# Altium PCB STC最小系统板.PCBDOC
Units mm, origin at the board's own origin, x right, y up, seen from the top; angles counter-clockwise.
Board outline 50 x 70 mm, 2 copper layers (Top Layer, Bottom Layer); 17 components, 39 nets, 137 pads, 0 vias.
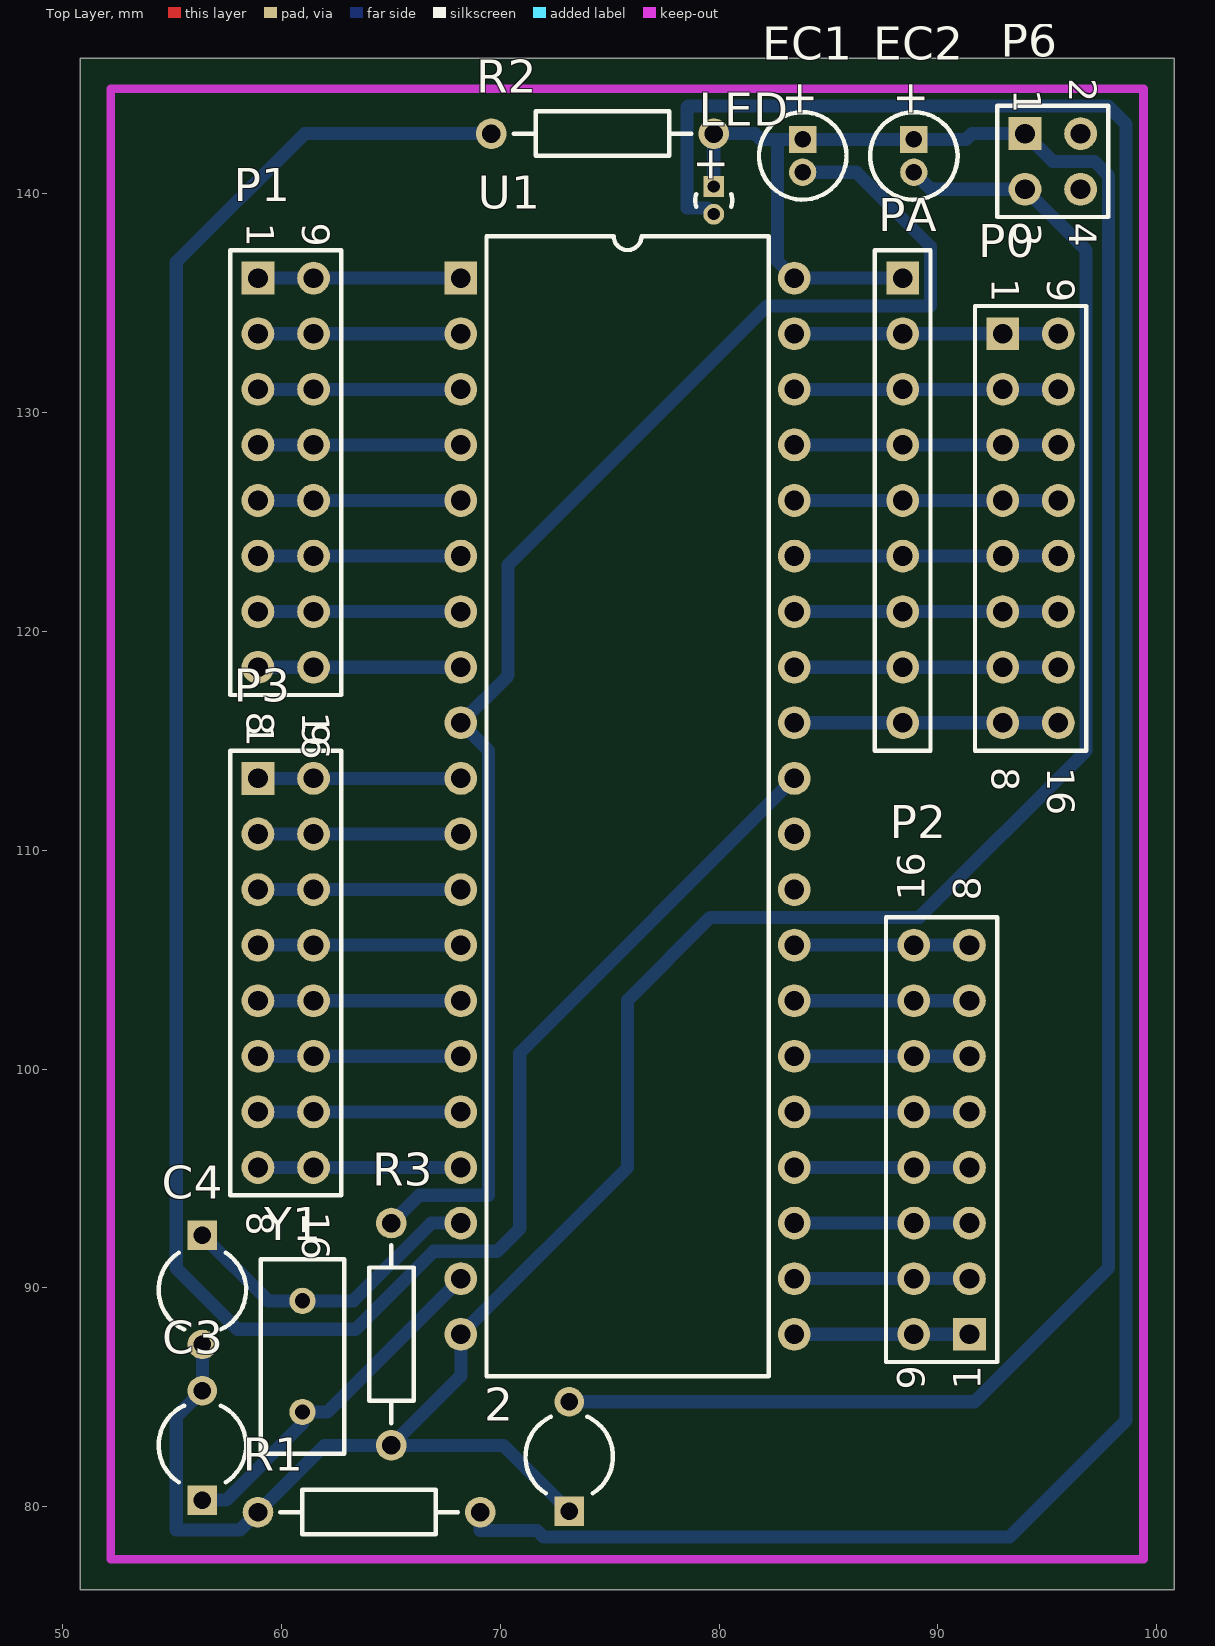
[diagram p0: Top Layer view]
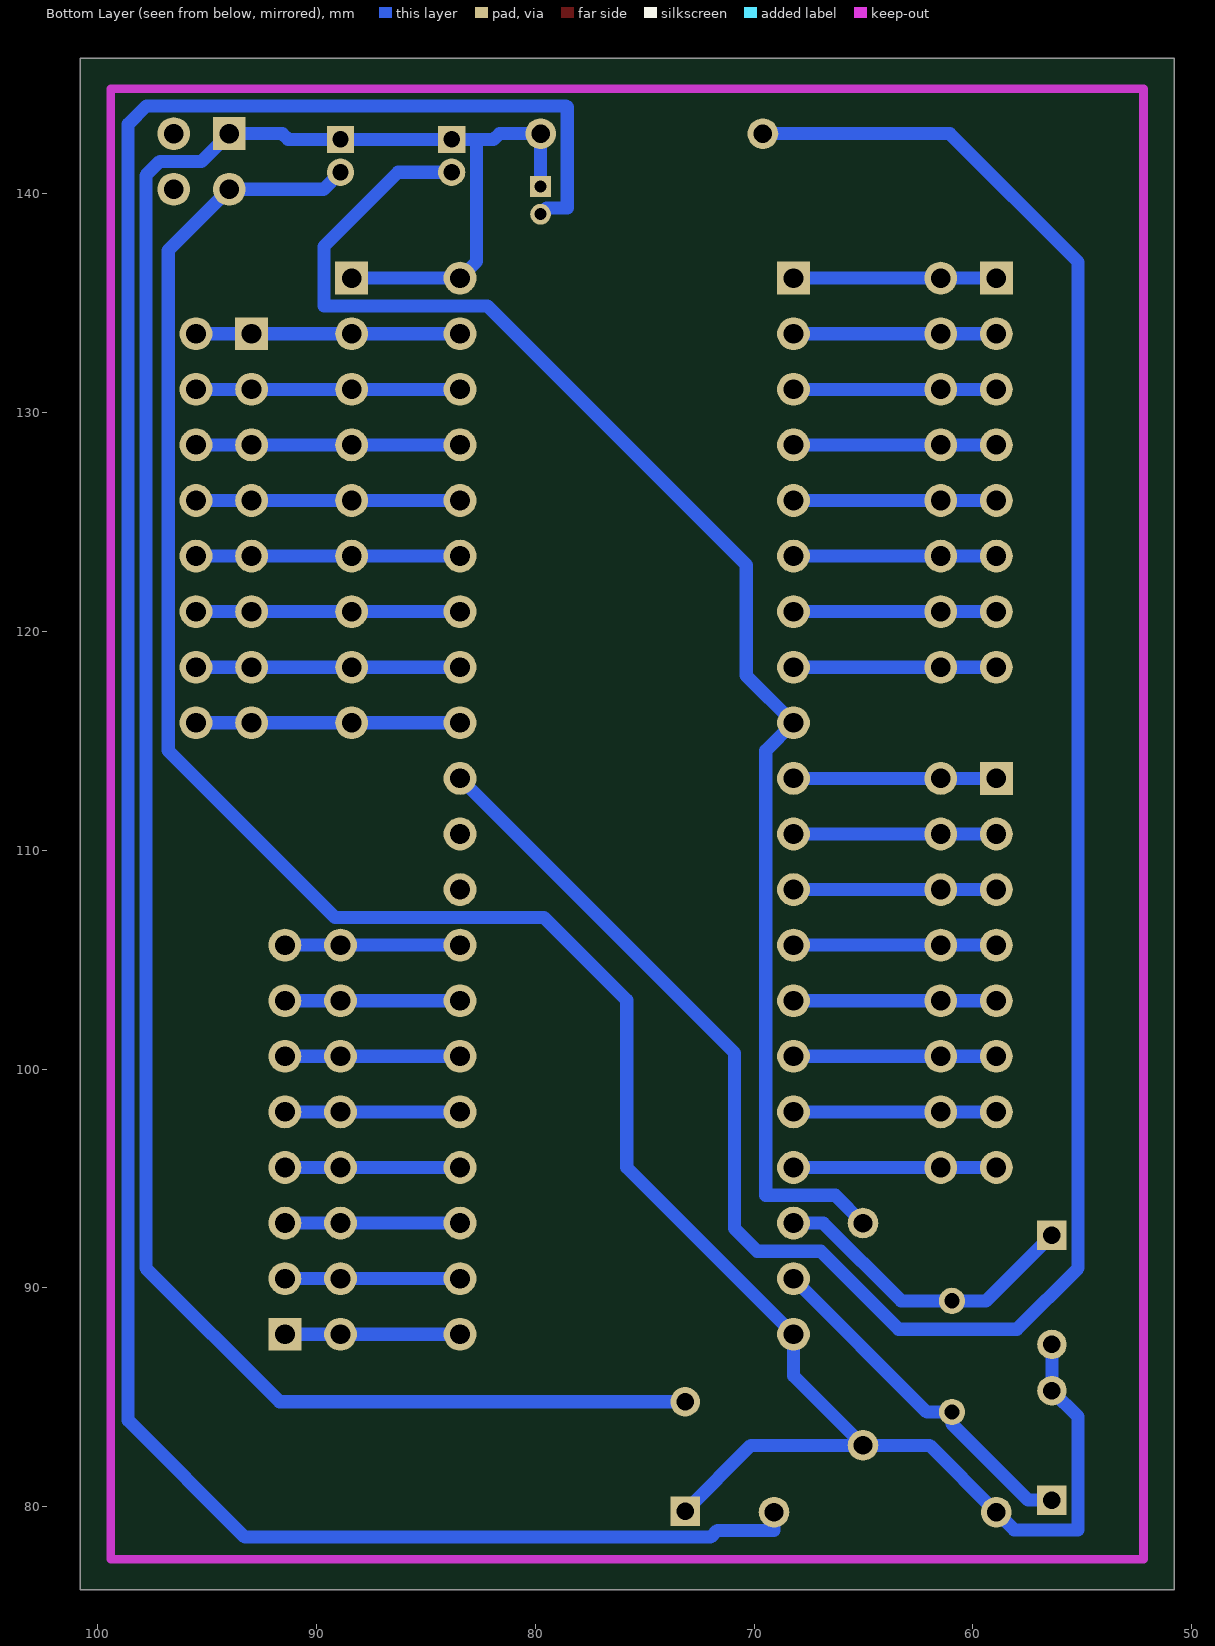
[diagram p1: Bottom Layer view, seen from below]

## Layer stack, top to bottom
Top Layer: signal copper 0.0356
Dielectric: dielectric 0.32, FR-4, Dk 4.8
Bottom Layer: signal copper 0.0356

## Board outline
50.8,76.2 100.8,76.2 100.8,146.2 50.8,146.2

## Design rules (kind name [scope] priority, off if disabled: settings)
Clearance [All] p1: gap=0.2
ComponentClearance [All] p1: gap=0.254 collisioncheckmode=0
PolygonConnect [All] p1: connectstyle=Relief reliefconductorwidth=0.254 reliefentries=4 polygonreliefangle="90 Angle"
RoutingLayers [All] p1: top layer_v5=FALSE bottom layer_v5=TRUE
RoutingVias [All] p1: holewidth=0.8 width=1.5 viastyle="Through Hole" minholewidth=0.711 minwidth=1.4 maxholewidth=0.711 maxwidth=1.6
SolderMaskExpansion [All] p1: expansion=0.102
TestPointUsage [All] p1: valid=0 allowmultiple=FALSE
Testpoint [All] p1: side=15 testpointundercomponent=TRUE minsize=1.016 maxsize=2.54 preferedsize=1.524 minholesize=0 maxholesize=1.016 preferedholesize=0.813 testpointgrid=0.025 style=1023 order=1234567890
Width Width_1 [All] p1: maxlimit=0.7 minlimit=0.6 preferedwidth=0.6
16 further rules are at their usual default settings.

## Components (designator, comment, footprint, x,y, rotation, side; value= is the part's Value field where it differs from the comment)
2 "Cap Semi" CAPR5-4X5 73.152,82.296 r90 top
C3 "Cap Semi" CAPR5-4X5 56.388,82.804 r90 top
C4 "Cap Semi" CAPR5-4X5 56.388,89.916 r270 top
EC1 "Cap Pol1" CAPPR1.5-4x5 83.82,141.732 r270 top
EC2 "Cap Pol1" CAPPR1.5-4x5 88.9,141.732 r270 top
LED "LED0" CAPPR1.27-1.7x2.8 79.756,139.7 r270 top
P0 "Header 8X2A" HDR2X8_CEN 92.964,133.604 r270 top
P1 "Header 8X2A" HDR2X8_CEN 58.928,136.144 r270 top
P2 "Header 8X2A" HDR2X8_CEN 91.44,87.884 r90 top
P3 "Header 8X2A" HDR2X8_CEN 58.928,113.284 r270 top
P6 "MHDR2X2" HDR2X2 93.98,142.748 r270 top
PA "Header 9" HDR1X9 88.392,136.144 r270 top
R1 "Res2" AXIAL-0.4 64.008,79.756 r180 top
R2 "Res2" AXIAL-0.4 74.676,142.748 r0 top
R3 "Res2" AXIAL-0.4 65.024,87.884 r270 top
U1 "AT89C51RC" DIP-40 75.819,112.014 r270 top
Y1 "XTAL" RAD-0.2 60.96,86.868 r90 top

## Footprints (in the part's own frame and the unit in brackets; to place one, negate y for a bottom-side part, rotate by r counter-clockwise, add the part's x,y. Pads: shape width x height; smd on the part's side, far side on the other; paste and mask are expansions set on the pad)
AXIAL-0.4 [mm] "Resistor; 2 Leads"
  round 1.4 hole 0.85: 1(-5.08,0) 2(5.08,0)
  silkscreen extent -4.06,-1.02 4.06,1.02
CAPPR1.5-4x5 [mm] "Capacitor, Electrolytic, Radial; Body 4 x 5 mm (Dia.xH typ); Pin Spacing 1.5 mm (typ)"
  rect 1.25x1.25 hole 0.75: 1(-0.75,0)
  round 1.25 hole 0.75: 2(0.75,0)
  silkscreen extent -2,-2 2,2
CAPPR1.27-1.7x2.8 [mm] "Capacitor, Radial, Tantalum; Body 1.7 x 2.8 mm (Dia.xH max); Pin Spacing 1.27 mm (typ)"
  rect 0.95x0.95 hole 0.55: 1(-0.635,0)
  round 0.95 hole 0.55: 2(0.635,0)
  silkscreen extent -0.29,-0.85 0.29,0.85
CAPR5-4X5 [mm] "Capacitor; 2 Leads"
  rect 1.35x1.35 hole 0.8: 1(-2.5,0)
  round 1.35 hole 0.8: 2(2.5,0)
  silkscreen extent -1.69,-2 1.82,2
DIP-40 [mm]
  rect 1.5x1.5 hole 0.9: 1(-24.13,-7.62)
  round 1.5 hole 0.9: 2(-21.59,-7.62) 3(-19.05,-7.62) 4(-16.51,-7.62) 5(-13.97,-7.62) 6(-11.43,-7.62) 7(-8.89,-7.62) 8(-6.35,-7.62) 9(-3.81,-7.62) 10(-1.27,-7.62) 11(1.27,-7.62) 12(3.81,-7.62) 13(6.35,-7.62) 14(8.89,-7.62) 15(11.43,-7.62) 16(13.97,-7.62) 17(16.51,-7.62) 18(19.05,-7.62) 19(21.59,-7.62) 20(24.13,-7.62) 21(24.13,7.62) 22(21.59,7.62) 23(19.05,7.62) 24(16.51,7.62) 25(13.97,7.62) 26(11.43,7.62) 27(8.89,7.62) 28(6.35,7.62) 29(3.81,7.62) 30(1.27,7.62) 31(-1.27,7.62) 32(-3.81,7.62) 33(-6.35,7.62) 34(-8.89,7.62) 35(-11.43,7.62) 36(-13.97,7.62) 37(-16.51,7.62) 38(-19.05,7.62) 39(-21.59,7.62) 40(-24.13,7.62)
  silkscreen extent -26.05,-6.45 26.05,6.45
HDR1X9 [mm] "Connector; Header; 9 Position"
  rect 1.5x1.5 hole 0.9: 1(0,0)
  round 1.5 hole 0.9: 2(2.54,0) 3(5.08,0) 4(7.62,0) 5(10.16,0) 6(12.7,0) 7(15.24,0) 8(17.78,0) 9(20.32,0)
  silkscreen extent -1.27,-1.27 21.59,1.27
HDR2X2 [mm] "Connector; Header; 2x2 Position"
  rect 1.5x1.5 hole 0.9: 1(0,0)
  round 1.5 hole 0.9: 2(0,2.54) 3(2.54,0) 4(2.54,2.54)
  silkscreen extent -1.27,-1.27 3.81,3.81
HDR2X8_CEN [mm] "Connector; Header; 8x2 Position"
  rect 1.5x1.5 hole 0.9: 1(0,0)
  round 1.5 hole 0.9: 2(2.54,0) 3(5.08,0) 4(7.62,0) 5(10.16,0) 6(12.7,0) 7(15.24,0) 8(17.78,0) 9(0,2.54) 10(2.54,2.54) 11(5.08,2.54) 12(7.62,2.54) 13(10.16,2.54) 14(12.7,2.54) 15(15.24,2.54) 16(17.78,2.54)
  silkscreen extent -1.27,-1.27 19.05,3.81
RAD-0.2 [mm] "Jumper Wire; 2 Leads"
  round 1.2 hole 0.7: 1(-2.54,0) 2(2.54,0)
  silkscreen extent -4.44,-1.91 4.44,1.91

## Part data
2 C3 C4: "Capacitor (Semiconductor SIM Model)"
EC1 EC2: "Polarized Capacitor (Radial)"
LED: "Typical INFRARED GaAs LED"
P0 P1 P2 P3: "Header, 8-Pin, Dual row"
P6: "Header, 2-Pin, Dual row"
PA: "Header, 9-Pin"
R1 R2 R3: "Resistor"
U1: "8-Bit Microcontroller with 32K Flash ROM"
Y1: "Crystal Oscillator"

## Nets (pads, with @x,y where several pads share a name; then routed paths per layer and width w, separated by ;. In a path a pad name is that pad's centre, name@x,y a point inside that pad or via, vN(x,y) a via of type N, cw(c..) or ccw(c..) an arc to the next point about the centre after c; other vN are vias at no path point)
GND: 2.1 C3.2 C4.2 EC2.2 P6.3 R1.2 R3.2 U1.20 | length 112.5
  Bottom Layer w0.6: C4.2 C3.2 55.194,84.11 55.194,78.943 58.115,78.943 R1.2 61.976,82.804 R3.2 ; 2.1 70.144,82.804 R3.2 ; EC2.2 89.674,140.208 P6.3 96.774,137.414 96.774,114.554 89.154,106.934 79.604,106.934 75.819,103.149 75.819,95.504 U1.20 68.199,85.979 R3.2
Net2_2: 2.2 EC1.1 EC2.1 LED.1 P6.1 PA.1 R2.2 U1.40 | length 110.2
  Bottom Layer w0.6: 2.2 91.679,84.796 97.79,90.907 97.79,140.843 97.155,141.478 95.25,141.478 P6.1 91.554,142.748 91.288,142.482 EC2.1 EC1.1 82.677,142.482 ; LED.1 R2.2 81.636,142.748 81.902,142.482 82.677,142.482 ; PA.1 U1.40 82.677,136.906 82.677,142.482
NetC3_1: C3.1 U1.19 Y1.1 | length 16.3
  Bottom Layer w0.6: C3.1 57.469,80.304 60.96,83.795 Y1.1 62.103,84.328 U1.19
NetC4_1: C4.1 U1.18 Y1.2 | length 14.5
  Bottom Layer w0.6: C4.1 59.396,89.408 Y1.2 63.282,89.408 66.838,92.964 U1.18
NetEC1_2: EC1.2 R3.1 U1.9 | length 69.4
  Bottom Layer w0.6: R3.1 66.294,94.234 69.469,94.234 69.469,114.554 U1.9 70.358,117.983 70.358,123.038 82.194,134.874 89.662,134.874 89.662,137.592 86.272,140.982 EC1.2
NetLED_2: LED.2 R1.1 | length 118.3
  Bottom Layer w0.6: R1.1 69.088,78.918 71.679,78.918 71.984,78.613 93.269,78.613 98.603,83.947 98.603,143.18 97.765,144.018 78.588,144.018 78.537,143.967 78.537,139.344 79.477,139.344 LED.2
NetP0_1: P0.1 P0.9 PA.2 U1.39 | length 12.1
  Bottom Layer w0.6: U1.39 PA.2 P0.1 P0.9
NetP0_2: P0.2 P0.10 PA.3 U1.38 | length 12.1
  Bottom Layer w0.6: U1.38 PA.3 P0.2 P0.10
NetP0_3: P0.3 P0.11 PA.4 U1.37 | length 12.1
  Bottom Layer w0.6: U1.37 PA.4 P0.3 P0.11
NetP0_4: P0.4 P0.12 PA.5 U1.36 | length 12.1
  Bottom Layer w0.6: U1.36 PA.5 P0.4 P0.12
NetP0_5: P0.5 P0.13 PA.6 U1.35 | length 12.1
  Bottom Layer w0.6: U1.35 PA.6 P0.5 P0.13
NetP0_6: P0.6 P0.14 PA.7 U1.34 | length 12.1
  Bottom Layer w0.6: U1.34 PA.7 P0.6 P0.14
NetP0_7: P0.7 P0.15 PA.8 U1.33 | length 12.1
  Bottom Layer w0.6: U1.33 PA.8 P0.7 P0.15
NetP0_8: P0.8 P0.16 PA.9 U1.32 | length 12.1
  Bottom Layer w0.6: U1.32 PA.9 P0.8 P0.16
NetP1_1: P1.1 P1.9 U1.1 | length 9.3
  Bottom Layer w0.6: P1.1 P1.9 U1.1
NetP1_2: P1.2 P1.10 U1.2 | length 9.3
  Bottom Layer w0.6: P1.2 P1.10 U1.2
NetP1_3: P1.3 P1.11 U1.3 | length 9.3
  Bottom Layer w0.6: P1.3 P1.11 U1.3
NetP1_4: P1.4 P1.12 U1.4 | length 9.3
  Bottom Layer w0.6: P1.4 P1.12 U1.4
NetP1_5: P1.5 P1.13 U1.5 | length 9.3
  Bottom Layer w0.6: P1.5 P1.13 U1.5
NetP1_6: P1.6 P1.14 U1.6 | length 9.3
  Bottom Layer w0.6: P1.6 P1.14 U1.6
NetP1_7: P1.7 P1.15 U1.7 | length 9.3
  Bottom Layer w0.6: P1.7 P1.15 U1.7
NetP1_8: P1.8 P1.16 U1.8 | length 9.3
  Bottom Layer w0.6: P1.8 P1.16 U1.8
NetP2_1: P2.1 P2.9 U1.21 | length 8
  Bottom Layer w0.6: U1.21 P2.9 P2.1
NetP2_2: P2.2 P2.10 U1.22 | length 8
  Bottom Layer w0.6: U1.22 P2.10 P2.2
NetP2_3: P2.3 P2.11 U1.23 | length 8
  Bottom Layer w0.6: U1.23 P2.11 P2.3
NetP2_4: P2.4 P2.12 U1.24 | length 8
  Bottom Layer w0.6: U1.24 P2.12 P2.4
NetP2_5: P2.5 P2.13 U1.25 | length 8
  Bottom Layer w0.6: U1.25 P2.13 P2.5
NetP2_6: P2.6 P2.14 U1.26 | length 8
  Bottom Layer w0.6: U1.26 P2.14 P2.6
NetP2_7: P2.7 P2.15 U1.27 | length 8
  Bottom Layer w0.6: U1.27 P2.15 P2.7
NetP2_8: P2.8 P2.16 U1.28 | length 8
  Bottom Layer w0.6: U1.28 P2.16 P2.8
NetP3_1: P3.1 P3.9 U1.10 | length 9.3
  Bottom Layer w0.6: P3.1 P3.9 U1.10
NetP3_2: P3.2 P3.10 U1.11 | length 9.3
  Bottom Layer w0.6: P3.2 P3.10 U1.11
NetP3_3: P3.3 P3.11 U1.12 | length 9.3
  Bottom Layer w0.6: P3.3 P3.11 U1.12
NetP3_4: P3.4 P3.12 U1.13 | length 9.3
  Bottom Layer w0.6: P3.4 P3.12 U1.13
NetP3_5: P3.5 P3.13 U1.14 | length 9.3
  Bottom Layer w0.6: P3.5 P3.13 U1.14
NetP3_6: P3.6 P3.14 U1.15 | length 9.3
  Bottom Layer w0.6: P3.6 P3.14 U1.15
NetP3_7: P3.7 P3.15 U1.16 | length 9.3
  Bottom Layer w0.6: P3.7 P3.15 U1.16
NetP3_8: P3.8 P3.16 U1.17 | length 9.3
  Bottom Layer w0.6: P3.8 P3.16 U1.17
NetR2_1: R2.1 U1.31 | length 107.3
  Bottom Layer w0.6: R2.1 61.062,142.748 55.194,136.881 55.194,90.907 57.988,88.113 63.393,88.113 66.954,91.674 69.855,91.674 70.891,92.71 70.891,100.736 U1.31
pads on no net: P6.2 P6.4 U1.29 U1.30

## Keep-outs
Keep-Out Layer:
  lines w0.4: 52.2,77.6 52.2,144.8 99.4,144.8 99.4,77.6 52.2,77.6

## Silkscreen, mask and mechanical layers (free items; w line width, h text height)
Drill Drawing:
  text ".LEGEND" at 105.88,81.28 h1.52
  text "Drill Drawing." at 105.88,78.74 h1.52

## Dimensions
52.2,77.6 to 52.2,144.8 on Mechanical 1
52.2,77.6 to 99.4,77.6 on Mechanical 1

## Text inside footprints (layer, text, board x,y; h text height)
EC1: Top Overlay "+" at 83.07,145.207 h1.5 r270
EC2: Top Overlay "+" at 88.15,145.207 h1.5 r270
LED: Top Overlay "+" at 79.006,142.185 h1.5 r270
P0: Top Overlay "9" at 94.996,136.144 h1.27 r270; Top Overlay "1" at 92.456,136.144 h1.27 r270; Top Overlay "8" at 92.456,113.792 h1.27 r270; Top Overlay "16" at 94.996,113.792 h1.27 r270
P1: Top Overlay "9" at 60.96,138.684 h1.27 r270; Top Overlay "1" at 58.42,138.684 h1.27 r270; Top Overlay "8" at 58.42,116.332 h1.27 r270; Top Overlay "16" at 60.96,116.332 h1.27 r270
P2: Top Overlay "9" at 89.408,85.344 h1.27 r90; Top Overlay "1" at 91.948,85.344 h1.27 r90; Top Overlay "8" at 91.948,107.696 h1.27 r90; Top Overlay "16" at 89.408,107.696 h1.27 r90
P3: Top Overlay "9" at 60.96,115.824 h1.27 r270; Top Overlay "1" at 58.42,115.824 h1.27 r270; Top Overlay "8" at 58.42,93.472 h1.27 r270; Top Overlay "16" at 60.96,93.472 h1.27 r270
P6: Top Overlay "3" at 93.472,138.684 h1.27 r270; Top Overlay "4" at 96.012,138.684 h1.27 r270; Top Overlay "2" at 96.012,145.288 h1.27 r270; Top Overlay "1" at 93.472,144.78 h1.27 r270